# Altium PCB waffling60_plate.PcbDoc
Units mm, origin at the board's own origin, x right, y up, seen from the top; angles counter-clockwise.
Board outline 284.7 x 94.2 mm, 2 copper layers (Component Side, Bottom Layer), stack 1.571 mm thick; 68 components, 103 nets, 212 pads, 0 vias.
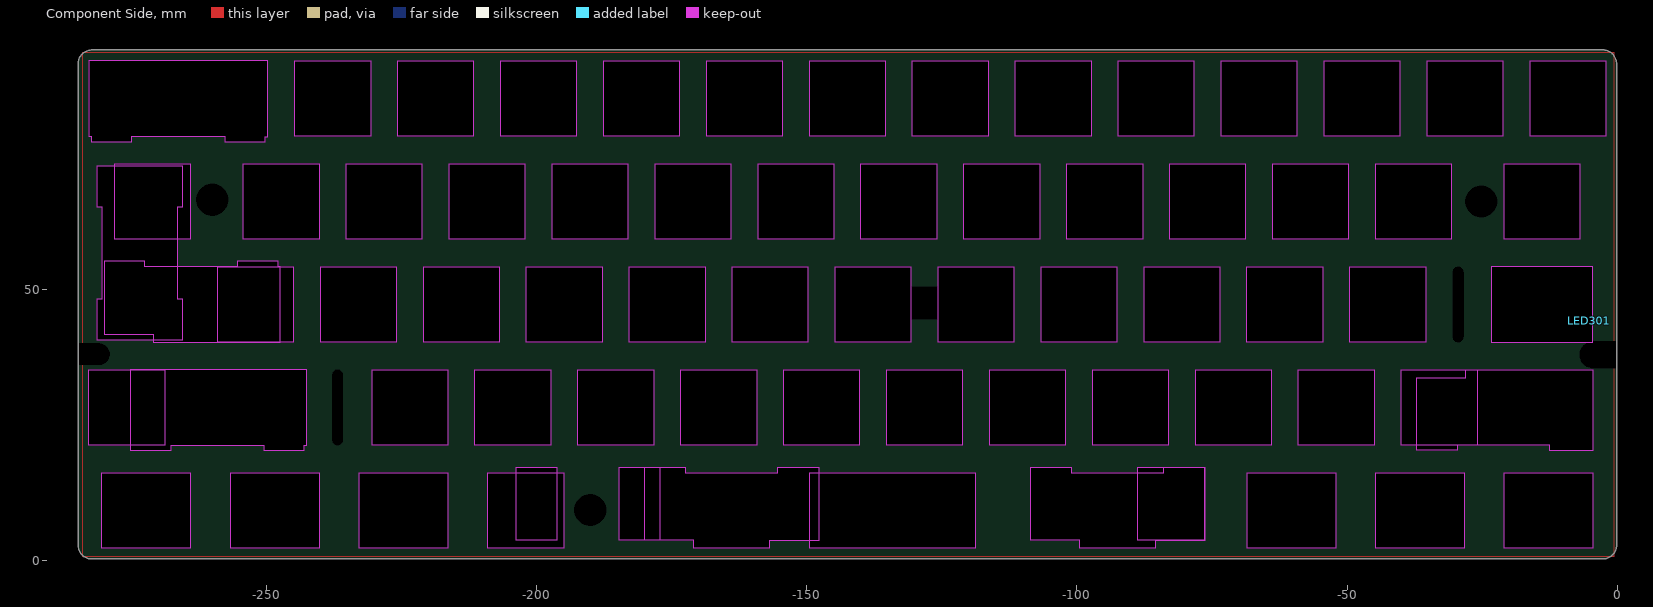
[diagram p0: Component Side view]
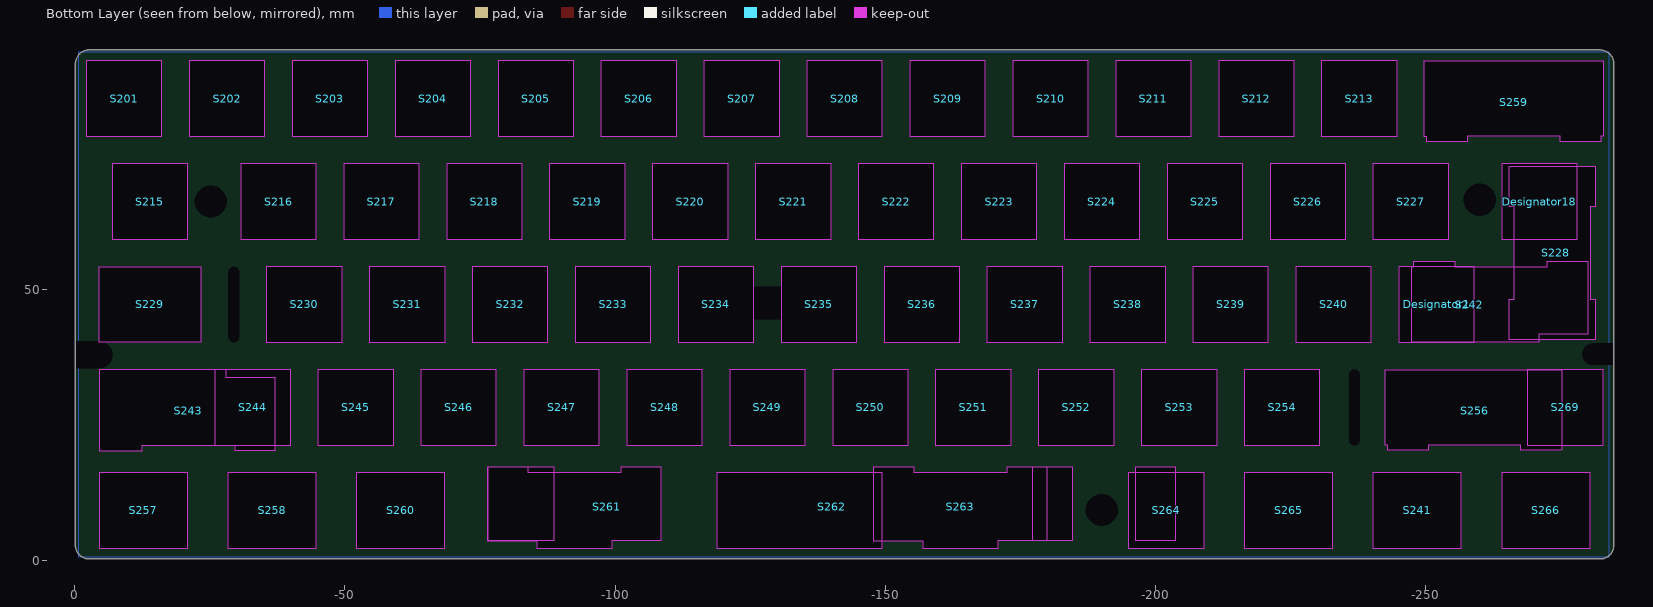
[diagram p1: Bottom Layer view, seen from below]

## Layer stack, top to bottom
Top Solder: solder mask 0.0102, Solder Resist, Dk 3.5
Component Side: signal copper 0.0356
Dielectric 1: core 1.5, FR-4, Dk 4.2
Bottom Layer: signal copper 0.0356
Solder Side: solder mask 0.0102, Solder Resist, Dk 3.5

## Board outline
-284.85,2.596 ccw(c-282.304,2.756) -282.526,0.215 -2.531,0.215 ccw(c-2.691,2.761) -0.15,2.539 -0.15,92.034 ccw(c-2.696,91.874) -2.474,94.415 -282.458,94.415 ccw(c-282.298,91.87) -284.839,92.091

## Design rules (kind name [scope] priority, off if disabled: settings)
Clearance [All] p1: gap=0.2 ignorepadtopadclearanceinfootprint=FALSE except(0: Arc-Hole Track-Hole SMDPad-Hole THPad-Hole Via-Hole Fill-Hole Poly-Hole Region-Hole Text-Hole; 0.254: THPad-THPad THPad-Via THPad-Fill THPad-Poly THPad-Region THPad-Text Via-Via Via-Fill Via-Poly Via-Region Via-Text Fill-Fill Fill-Poly Fill-Region Fill-Text Poly-Poly Poly-Region Poly-Text Region-Region Region-Text Text-Text)
ComponentClearance [InComponent('No Component') And OnLayer('Component Side')] p1: gap=0.254 collisioncheckmode=3 verticalgap=0.254 showdistances=FALSE
DiffPairsRouting DiffPairsRouting_USB [InDifferentialPairClass('All Differential Pairs')] p1: maxlimit=0.254 minlimit=0.203 mostfreqgap=0.203 toplayer_minwidth=0.152 toplayer_maxwidth=0.381 toplayer_prefwidth=0.152 bottomlayer_minwidth=0.152 bottomlayer_maxwidth=0.381 bottomlayer_prefwidth=0.152 maxuncoupledlength=12.7
DiffPairsRouting [All] p2: maxlimit=0.254 minlimit=0.254 mostfreqgap=0.254 toplayer_minwidth=0.381 toplayer_maxwidth=0.381 toplayer_prefwidth=0.381 bottomlayer_minwidth=0.381 bottomlayer_maxwidth=0.381 bottomlayer_prefwidth=0.381 maxuncoupledlength=12.7
HoleSize [All] p1: absolutevalues=TRUE maxlimit=20 minlimit=0.025 maxpercent=80.000 minpercent=20.000
MatchedLengths MatchedLengths_USB_DiffPairs_1 [All] p1: tolerance=0.127 checknetsindiffpair=TRUE checkdiffpairvsdiffpair=FALSE checkxsignals=FALSE checkothers=FALSE
MatchedLengths MatchedLengths_USB_DiffPairs [All] p2: tolerance=0.127 checknetsindiffpair=TRUE checkdiffpairvsdiffpair=FALSE checkxsignals=FALSE checkothers=FALSE
PolygonConnect PolygonConnect_1 [All vs IsVia] p1: connectstyle=Direct reliefconductorwidth=0.254 reliefentries=4 polygonreliefangle="90 Angle" airgapwidth=0.254
PolygonConnect [All] p2: connectstyle=Relief reliefconductorwidth=0.254 reliefentries=4 polygonreliefangle="90 Angle" airgapwidth=0.254
RoutingVias [All] p1: holewidth=0.711 width=1.27 viastyle="Through Hole" minholewidth=0.711 minwidth=1.27 maxholewidth=0.711 maxwidth=1.27
SolderMaskExpansion [All] p1: expansion=0.102 istentingtop=FALSE
Width [All] p1: maxlimit=0.254 minlimit=0.203 preferedwidth=0.254
27 further rules are at their usual default settings.

## Classes and differential pairs
differential pair D: +D_P -D_N
differential pair D_PRE: +D_PRE_P -D_PRE_N

## Components (designator, comment, footprint, x,y, rotation, side; value= is the part's Value field where it differs from the comment)
Designator1 "Comment" Plate_MX_1U -252.037,47.315 r180 bottom
Designator18 "Comment" PLATE_MX_1.5U -271.087,66.365 r180 bottom
LED301 "QT QBLP677R-RGB" "QT QBLP677R-RGB" -5.221,44.311 r180 top
S201 "MX" PLATE_MX_1U -9.15,85.415 r0 bottom
S202 "MX" PLATE_MX_1U -28.2,85.415 r0 bottom
S203 "MX" PLATE_MX_1U -47.25,85.415 r180 bottom
S204 "MX" PLATE_MX_1U -66.3,85.415 r180 bottom
S205 "MX" PLATE_MX_1U -85.35,85.415 r180 bottom
S206 "MX" PLATE_MX_1U -104.4,85.415 r180 bottom
S207 "MX" PLATE_MX_1U -123.45,85.415 r180 bottom
S208 "MX" PLATE_MX_1U -142.5,85.415 r180 bottom
S209 "MX" PLATE_MX_1U -161.55,85.415 r180 bottom
S210 "MX" PLATE_MX_1U -180.6,85.415 r180 bottom
S211 "MX" PLATE_MX_1U -199.65,85.415 r180 bottom
S212 "MX" PLATE_MX_1U -218.7,85.415 r180 bottom
S213 "MX" Plate_MX_1U -237.75,85.415 r180 bottom
S215 "MX" PLATE_MX_1.5U -13.912,66.365 r180 bottom
S216 "MX" PLATE_MX_1U -37.725,66.365 r180 bottom
S217 "MX" PLATE_MX_1U -56.775,66.365 r180 bottom
S218 "MX" PLATE_MX_1U -75.825,66.365 r180 bottom
S219 "MX" PLATE_MX_1U -94.875,66.365 r180 bottom
S220 "MX" PLATE_MX_1U -113.925,66.365 r180 bottom
S221 "MX" PLATE_MX_1U -132.975,66.365 r180 bottom
S222 "MX" PLATE_MX_1U -152.025,66.365 r180 bottom
S223 "MX" PLATE_MX_1U -171.075,66.365 r180 bottom
S224 "MX" PLATE_MX_1U -190.125,66.365 r180 bottom
S225 "MX" PLATE_MX_1U -209.175,66.365 r180 bottom
S226 "MX" PLATE_MX_1U -228.225,66.365 r180 bottom
S227 "MX" PLATE_MX_1U -247.275,66.365 r180 bottom
S228 "MX" "PLATE_MX - ISO_ENTER - DUAL STABS" -271.087,66.365 r0 bottom
S229 "MX" "PLATE_MX - CAPS_STEPPED_DUAL" -16.294,47.315 r180 bottom
S230 "MX" PLATE_MX_1U -42.487,47.315 r180 bottom
S231 "MX" PLATE_MX_1U -61.537,47.315 r180 bottom
S232 "MX" PLATE_MX_1U -80.587,47.315 r180 bottom
S233 "MX" PLATE_MX_1U -99.637,47.315 r180 bottom
S234 "MX" PLATE_MX_1U -118.687,47.315 r180 bottom
S235 "MX" PLATE_MX_1U -137.737,47.315 r180 bottom
S236 "MX" PLATE_MX_1U -156.787,47.315 r180 bottom
S237 "MX" PLATE_MX_1U -175.837,47.315 r180 bottom
S238 "MX" PLATE_MX_1U -194.887,47.315 r180 bottom
S239 "MX" PLATE_MX_1U -213.937,47.315 r180 bottom
S240 "MX" PLATE_MX_1U -232.987,47.315 r180 bottom
S241 "MX" "PLATE_MX - MOD_CENTER" -247.274,9.215 r0 bottom
S242 "MX" "PLATE_MX - ENTER_ANSI_ISO_KEY_V2" -263.95,47.315 r180 bottom
S243 "MX" "PLATE_MX - Left shift rotated stab" -21.056,28.265 r180 bottom
S244 "MX" PLATE_MX_1U -32.962,28.265 r180 bottom (schematic designator S230)
S245 "MX" PLATE_MX_1U -52.012,28.265 r180 bottom
S246 "MX" PLATE_MX_1U -71.062,28.265 r180 bottom
S247 "MX" PLATE_MX_1U -90.112,28.265 r180 bottom
S248 "MX" PLATE_MX_1U -109.162,28.265 r180 bottom
S249 "MX" PLATE_MX_1U -128.212,28.265 r180 bottom
S250 "MX" PLATE_MX_1U -147.262,28.265 r180 bottom
S251 "MX" PLATE_MX_1U -166.312,28.265 r180 bottom
S252 "MX" PLATE_MX_1U -185.362,28.265 r180 bottom
S253 "MX" PLATE_MX_1U -204.412,28.265 r180 bottom
S254 "MX" PLATE_MX_1U -223.462,28.265 r180 bottom
S256 "MX" "PLATE_MX - RIGHT SHIFT" -259.08,28.265 r180 bottom
S257 "MX" "PLATE_MX - MODIFIER" -13.912,9.215 r180 bottom
S258 "MX" "PLATE_MX - MOD_CENTER" -37.724,9.215 r180 bottom
S259 "MX" "PLATE_MX - backspace" -266.325,85.415 r180 bottom
S260 "MX" "PLATE_MX - MODIFIER" -61.537,9.215 r180 bottom
S261 "MX" "PLATE_MX - L SPLIT SPACE" -102.018,9.215 r0 bottom
S262 "MX" "PLATE_MX - SPACE_V2" -142.499,9.215 r180 bottom
S263 "MX" "PLATE_MX- R SPLIT SPACE" -163.931,9.215 r0 bottom
S264 "MX" PLATE_MX_1U -202.031,9.215 r180 bottom
S265 "MX" "PLATE_MX - MODIFIER" -223.462,9.215 r0 bottom
S266 "MX" "PLATE_MX - MODIFIER" -271.087,9.215 r0 bottom
S269 "MX" PLATE_MX_1U -275.85,28.265 r0 bottom

## Footprints (in the part's own frame and the unit in brackets; to place one, negate y for a bottom-side part, rotate by r counter-clockwise, add the part's x,y. Pads: shape width x height; smd on the part's side, far side on the other; paste and mask are expansions set on the pad)
"PLATE_MX - backspace" [mm]
  round 3.988 on Mech14: ""(-11.938,-8.255) ""(11.938,-8.255)
  round 3.048 on Mech14: ""(-11.938,6.985) ""(11.938,6.985)
  round 1 on Mech14: ""(0,0) ""(0,0) ""(0,0) ""(9.525,0) ""(9.525,0) ""(9.525,0)
  Keep-Out Layer board cut-out: -16.1,-7.97 -16.1,-7.1 -16.525,-7.1 -16.525,7 16.525,7 16.525,-6.996 16.1,-6.996 16.1,-7.97 8.576,-7.97 8.576,-6.996 -8.576,-6.996 -8.576,-7.97
"PLATE_MX - CAPS_STEPPED_DUAL" [mm]
  round 1 on Mech14: ""(-4.763,0) ""(0,0)
  Keep-Out Layer board cut-out: -11.763,-7 -11.762,7 7,7 7,-7
"PLATE_MX - ENTER_ANSI_ISO_KEY_V2" [mm]
  round 1 on Mech14: ""(-11.652,-0.032) ""(-11.652,-0.032) ""(0,0) ""(0,0)
  Keep-Out Layer board cut-out: 16.1,7.97 16.1,-5.53 7,-5.53 7,-7 -16.525,-7 -16.525,7 -16.1,7 -16.1,7.97 -8.576,7.97 -8.576,7 6.614,7 8.576,7 8.576,7.97
"PLATE_MX - ISO_ENTER - DUAL STABS" [mil]
  round 157.01 on Mech14: ""(-418.75,-95) ""(-418.75,845)
  round 39.37 on Mech14: ""(-93.75,375)
  round 120 on Mech14: ""(181.25,-95) ""(181.25,845)
  Keep-Out Layer board cut-out: -407.53,-258.86 -407.53,39 -369.34,39 -369.34,39 -369.34,712.64 -369.34,712.64 -407.52,712.64 -407.52,712.64 -407.52,1008.85 -407.53,1008.86 220.03,1008.86 220.03,711 181.84,711 181.84,711 181.84,37.36 181.84,37.36 220.02,37.36 220.02,37.36 220.02,-258.85 220.03,-258.86
"PLATE_MX - L SPLIT SPACE" [mm]
  round 3.988 on Mech14: ""(-2.413,-8.255)
  round 3.048 on Mech14: ""(-2.413,6.985)
  round 1 on Mech14: ""(9.525,0) ""(9.525,0) ""(9.525,0)
  Keep-Out Layer board cut-out: 0.949,-7.97 0.949,-6.985 18.101,-6.985 18.101,-7.97 25.654,-7.97 25.654,5.63 16.525,5.63 16.525,7 2.525,7 2.525,5.53 -6.575,5.53 -6.575,-7.97
"PLATE_MX - Left shift rotated stab" [mil]
  round 157.01 on Mech14: ""(-470,-325) ""(470,-325)
  round 120 on Mech14: ""(-470,275) ""(470,275)
  round 39.37 on Mech14: ""(-375,0) ""(0,0)
  Keep-Out Layer board cut-out: -650.59,275 -650.59,-314.96 -337.64,-314.96 -337.64,-275.59 337.64,-275.59 337.64,-313.78 632.64,-313.78 632.64,217.72 275.59,217.71 275.59,275
"PLATE_MX - MOD_CENTER" [mm]
  round 1 on Mech14: ""(-2.381,0) ""(-2.381,0) ""(-2.381,0) ""(-2.381,0) ""(0,0) ""(0,0) ""(0,0) ""(0,0) ""(0,0) ""(0,0)
  Keep-Out Layer board cut-out: 7,7 -9.381,7 -9.381,-7 7,-7
"PLATE_MX - MODIFIER" [mm]
  round 1 on Mech14: ""(-2.381,0) ""(-2.381,0) ""(0,0) ""(0,0)
  Keep-Out Layer board cut-out: -9.381,-7 7,-7 7,7 -9.381,7
"PLATE_MX - RIGHT SHIFT" [mil]
  round 157.01 on Mech14: ""(-470,-325) ""(470,-325)
  round 120 on Mech14: ""(-470,275) ""(470,275)
  round 39.37 on Mech14: ""(-375,0) ""(0,0)
  Keep-Out Layer board cut-out: -633.86,-313.78 -633.86,-275.59 -650.59,-275.59 -650.59,275.59 633.86,275.59 633.86,-313.78 337.05,-313.78 337.05,-275.59 -337.64,-275.59 -337.64,-313.78
"PLATE_MX - SPACE_V2" [mm]
  round 3.048 on Mech14: ""(-61.91,-6.985) ""(-57.15,-6.985) ""(38.09,-6.985) ""(57.15,-6.985)
  round 3.988 on Mech14: ""(-61.91,8.255) ""(-57.15,8.255) ""(38.09,8.255) ""(57.15,8.255)
  round 1 on Mech14: ""(-16.676,0) ""(-16.676,0) ""(-16.676,0) ""(-16.676,0) ""(-11.596,0) ""(-11.596,0) ""(0,0) ""(0,0) ""(0,0) ""(0,0)
  Keep-Out Layer board cut-out: 53.788,-5.53 61.312,-5.53 61.312,7.97 53.788,7.97
  Keep-Out Layer board cut-out: 34.728,-5.53 42.252,-5.53 42.252,7.97 34.728,7.97
  Keep-Out Layer board cut-out: -66.072,-5.53 -53.788,-5.53 -53.788,7.97 -66.072,7.97
  Keep-Out Layer board cut-out: -23.676,-7 7,-7 7,7 -23.676,7
"PLATE_MX- R SPLIT SPACE" [mm]
  round 3.988 on Mech14: ""(-11.938,-8.255) ""(11.938,-8.255)
  round 3.048 on Mech14: ""(-11.938,6.985) ""(11.938,6.985)
  round 1 on Mech14: ""(0,0) ""(0,0) ""(0,0) ""(0,0)
  Keep-Out Layer board cut-out: -8.576,-7.97 -8.576,-6.985 8.576,-6.985 8.576,-7.97 16.129,-7.97 16.129,5.63 7,5.63 7,7 -7,7 -7,5.53 -16.1,5.53 -16.1,-7.97
PLATE_MX_1.5U [mm]
  round 1 on Mech14: ""(0,0) ""(0,0)
  Component Side pour cut-out: -7,-7 7,-7 7,7 -7,7
  Keep-Out Layer board cut-out: -7,-7 7,-7 7,7 -7,7
Plate_MX_1U [mm]
  round 1 on Mech14: ""(0,0) ""(0,0)
  Component Side pour cut-out: -7,-7 7,-7 7,7 -7,7
  Keep-Out Layer board cut-out: -7,-7 7,-7 7,7 -7,7
PLATE_MX_1U [mm]
  round 1 on Mech14: ""(0,0) ""(0,0)
  Component Side pour cut-out: -7,-7 7,-7 7,7 -7,7
  Keep-Out Layer board cut-out: 7,7 -7,7 -7,-7 7,-7
"QT QBLP677R-RGB" [mm]

## Part data
S201 S202 S203 S204 S205 S206 S207 S208 S209 S210 S211 S212 S213 S216 S217 S218 S219 S220 S221 S222 S223 S224 S225 S226 S227 S228 S229 S230 S231 S232 S233 S234 S235 S236 S237 S238 S239 S240 S241 S242 S243 S244 S245 S246 S247 S248 S249 S250 S251 S252 S253 S254 S256 S257 S258 S259 S260 S261 S262 S263 S264 S265 S266 S269: library part SW-PB, "Switch"
S215: library part SW-PB, "TAB"

## Free pads (board coordinates)
  round 0 hole 2 slot 14 at 90 deg: 3(-236.855,28.265) 3(-29.464,47.315)
  round 0 hole 4 slot 10 at 0 deg unplated: ""(-284,38.115)
  round 0 hole 6 unplated: ""(-260.05,66.715) ""(-25.2,66.365)
  round 0 hole 6: ""(-190.119,9.271)
  round 0 hole 6 slot 15 at 0 deg unplated: ""(-128.2,47.615)
  round 0 hole 5 slot 10 at 0 deg unplated: ""(-2,37.988)

## Nets (pads, with @x,y where several pads share a name; then routed paths per layer and width w, separated by ;. In a path a pad name is that pad's centre, name@x,y a point inside that pad or via, vN(x,y) a via of type N, cw(c..) or ccw(c..) an arc to the next point about the centre after c; other vN are vias at no path point)
col1: 
col2: 
col3: 
col4: 
col5: 
col6: 
col7: 
col8: 
col9: 
col10: 
col11: 
D_N: 
D_P: 
D_PRE_N: 
D_PRE_P: 
GND: pad.3@-29.464,47.315
MOSI: 
NetC304_2: 
NetC305_2: 
NetC306_2: 
NetCON301_A5: 
NetCON301_B5: 
NetD201_1: 
NetD202_1: 
NetD203_1: 
NetD204_1: 
NetD205_1: 
NetD206_1: 
NetD207_1: 
NetD208_1: 
NetD209_1: 
NetD210_1: 
NetD211_1: 
NetD212_1: 
NetD213_1: 
NetD214_1: 
NetD215_1: 
NetD216_1: 
NetD217_1: 
NetD218_1: 
NetD219_1: 
NetD220_1: 
NetD221_1: 
NetD222_1: 
NetD223_1: 
NetD224_1: 
NetD225_1: 
NetD226_1: 
NetD227_1: 
NetD228_1: 
NetD229_1: 
NetD230_1: 
NetD231_1: 
NetD232_1: 
NetD233_1: 
NetD234_1: 
NetD235_1: 
NetD236_1: 
NetD237_1: 
NetD238_1: 
NetD239_1: 
NetD240_1: 
NetD241_1: 
NetD242_1: 
NetD243_1: 
NetD244_1: 
NetD245_1: 
NetD246_1: 
NetD247_1: 
NetD248_1: 
NetD249_1: 
NetD250_1: 
NetD251_1: 
NetD252_1: 
NetD253_1: 
NetD254_1: 
NetD256_1: 
NetD257_1: 
NetD258_1: 
NetD259_1: 
NetD260_1: 
NetD261_1: 
NetD262_1: 
NetD263_1: 
NetD264_1: 
NetD265_1: 
NetD266_1: 
NetD269_1: 
NetLED301_1: 
NetLED301_2: 
NetLED301_3: 
NetR301_1: 
PWM1: 
PWM2: 
PWM3: 
RAW: 
row1: 
row2: 
row3: 
row4: 
row5: 
RST: 
VCC: 
pads on no net: Designator1. Designator18. S201. S202. S203. S204. S205. S206. S207. S208. S209. S210. S211. S212. S213. S215. S216. S217. S218. S219. S220. S221. S222. S223. S224. S225. S226. S227. S228. S229. S230. S231. S232. S233. S234. S235. S236. S237. S238. S239. S240. S241. S242. S243. S244. S245. S246. S247. S248. S249. S250. S251. S252. S253. S254. S256. S257. S258. S259. S260. S261. S262. S263. S264. S265. S266. S269.

## Polygon pours and split planes (outlines as drawn)
GND on Bottom Layer "Component Side-No Net" (solid, shelved, pour order 0): -0.635,93.995 -0.635,0.65 -283.972,0.65 -283.972,93.995
GND on Component Side "Component Side-No Net" (solid, shelved, pour order 2): -0.635,93.995 -0.635,0.65 -283.972,0.65 -283.972,93.995

## Silkscreen, mask and mechanical layers (free items; w line width, h text height)
outline:
  the board outline again, w0.2
Mechanical 16:
  circle w0.2: c-113.792,9.271 r2
  circle w0.2: c-190.119,9.271 r3
  circle w0.2: c-260.05,66.715 r3
  circle w0.2: c-25.2,66.365 r3
  lines w0.2: -284.85,92.091 -284.85,40.894 -281.94,40.894 cw(c-281.94,37.894) -281.94,34.894 -284.85,34.894 -284.85,2.596 ccw(c-282.304,2.756) -282.526,0.215 -2.531,0.215 ccw(c-2.691,2.761) -0.15,2.539 -0.15,34.925 -3.81,34.925 cw(c-3.81,37.925) -3.81,40.925 -0.15,40.925 -0.15,92.034 ccw(c-2.696,91.874) -2.474,94.415 -282.458,94.415 ccw(c-282.298,91.87) -284.839,92.091 ; -282.821,21.236 -275.18,21.236 -275.18,20.295 ; -281.439,40.74 -270.95,40.74 -270.95,40.315 ; -281.439,72.94 -278.129,72.94 -278.087,72.982 -278.087,73.365 ; -266.469,59.342 -266.469,54.315 -255.374,54.315 ; -266.446,59.365 -264.087,59.365 ; -247.425,40.315 -245.037,40.315 ; -247.425,54.315 -245.037,54.315 ; -209.031,16.215 -203.852,16.215 ; -203.811,16.256 -203.811,17.185 ; -196.287,16.256 -196.287,17.185 ; -196.247,16.215 -195.031,16.215 ; -156.91,3.564 -149.5,3.564 -149.5,2.215 ; -147.802,16.316 -147.802,17.185 ; -147.701,16.215 -118.823,16.215 ; -130.737,40.315 -130.737,44.577 ; -130.737,50.546 -130.737,54.315 ; -125.688,40.315 -125.688,44.577 ; -125.688,50.546 -125.688,54.315 ; -88.711,16.266 -88.711,17.185 ; -39.962,21.265 -37.637,21.265 -37.637,20.295 -35.052,20.295 ; -39.951,35.276 -37.581,35.276 -27.443,35.276 ; -237.855,22.225 ccw(c-236.855,22.225) -235.855,22.225 -235.855,34.305 ccw(c-236.855,34.305) -237.855,34.305 -237.855,22.225 ; -30.464,41.275 ccw(c-29.464,41.275) -28.464,41.275 -28.464,53.355 ccw(c-29.464,53.355) -30.464,53.355 -30.464,41.275
  lines w0.254: -130.737,44.577 -125.688,44.577 ; -130.737,50.546 -125.688,50.546
  text "14mmx14mm" at -160.02,27.559 h1.5
  text "Remove space in squares and rounded slots" at -121.539,9.398 h1.5